# EAGLE board HACKberry_SizeM_Left (EAGLE 8.3.2)
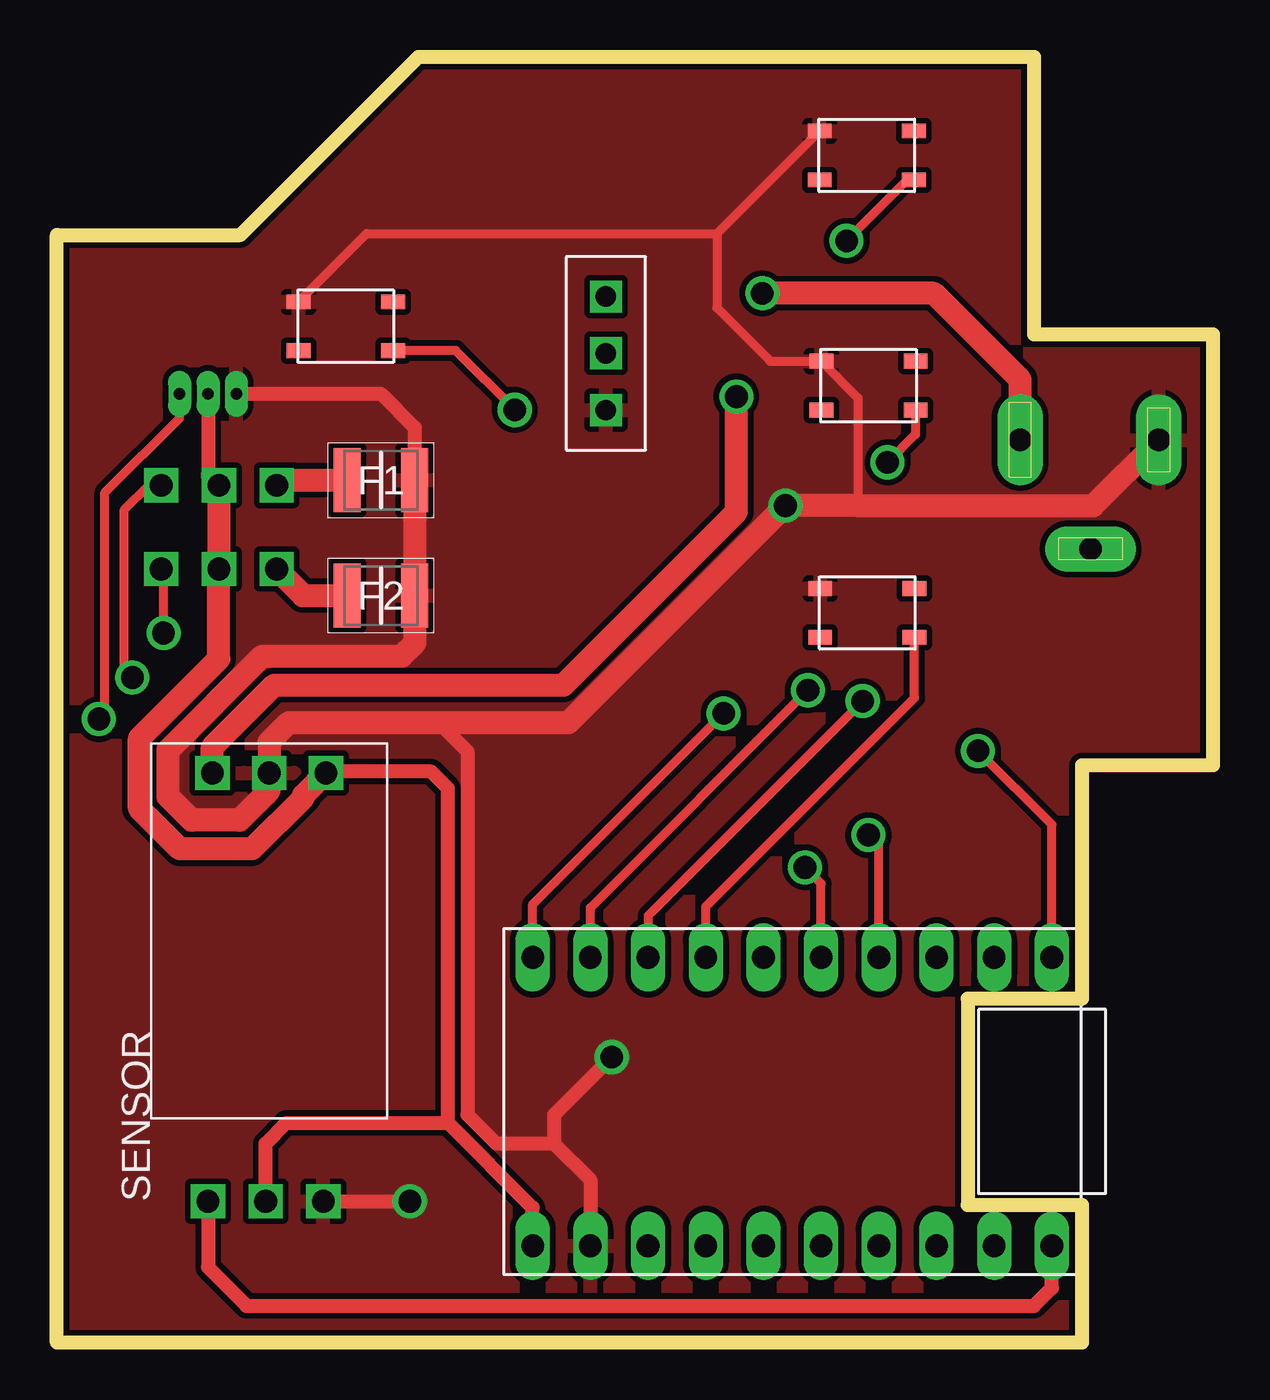
[diagram p0: board, top side]
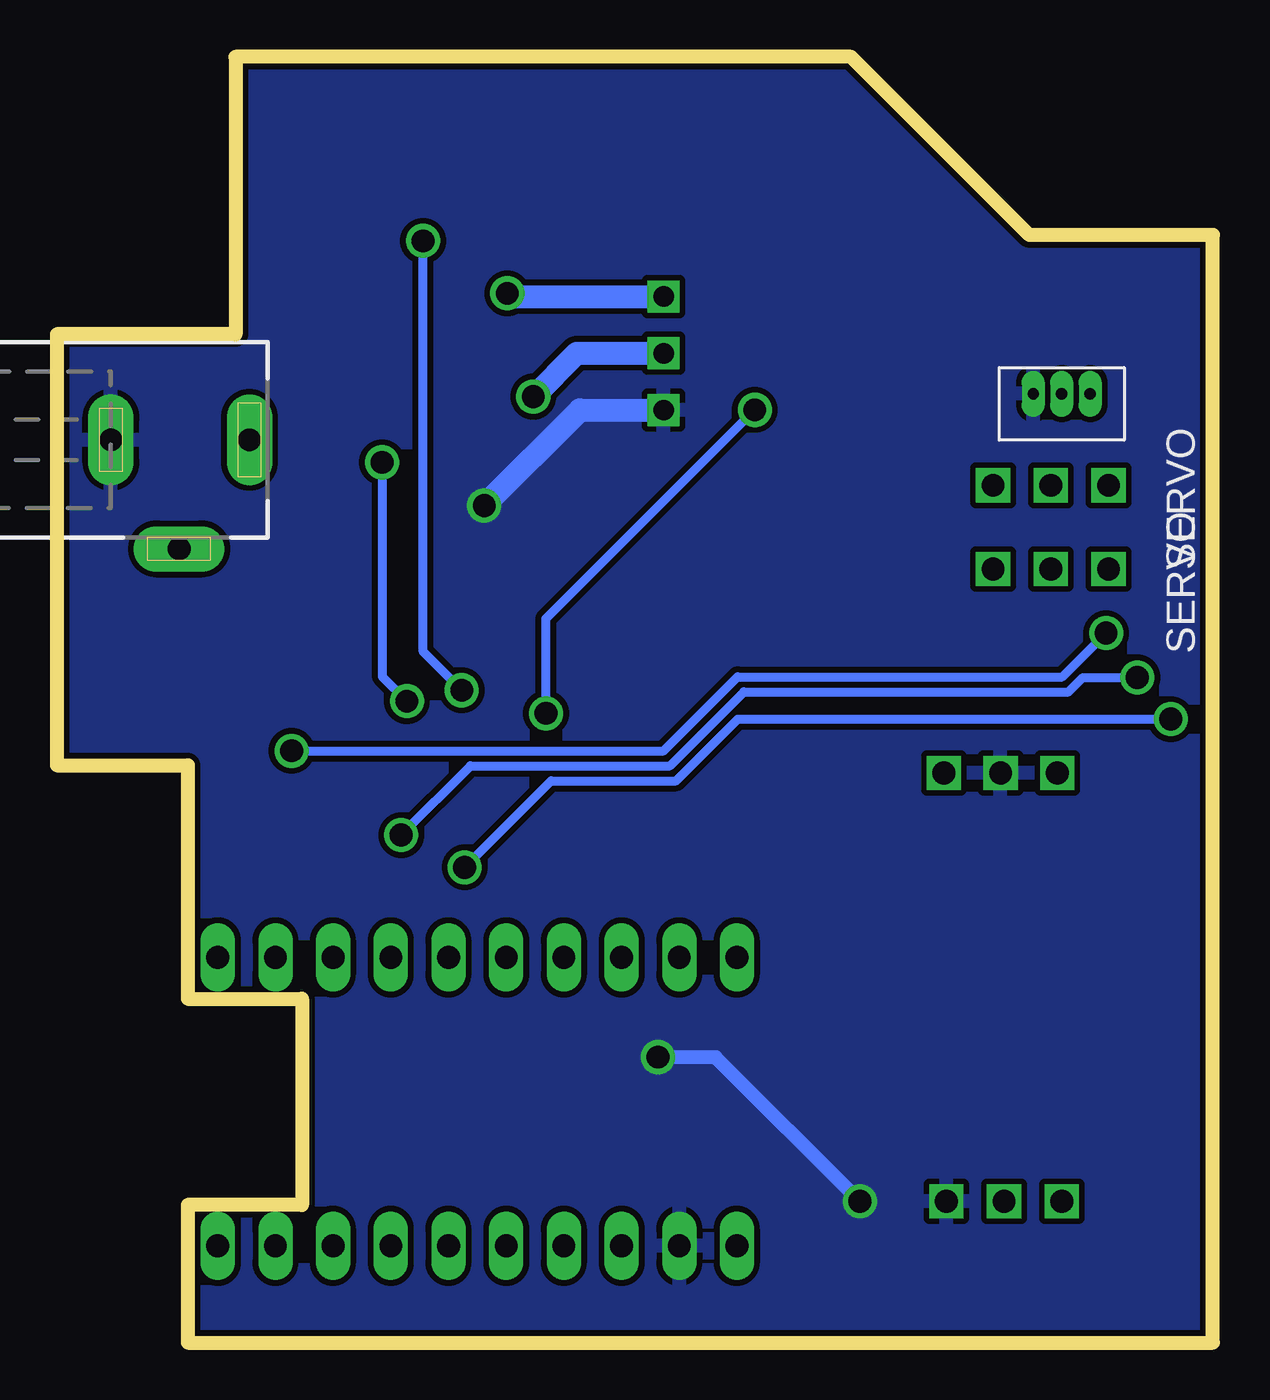
[diagram p1: board, bottom side, seen from below]

Size 50.9 x 56.62 mm. Coordinates in mm from the lower left corner, seen from the top.
Outline: 50.9,44.4 50.9,25.42 45.14,25.42 45.14,15.14 40.11,15.14 40.11,6.07 45.14,6.07 45.14,0 0,0 0,48.77 8.08,48.77 15.93,56.62 43.03,56.62 43.03,44.4 50.9,44.4
Copper layers (1*16): Top 0.035mm / dielectric 1.5mm / Bottom 0.035mm
Design rules "default *": minimum track width 6mil, minimum drill 0.35mm, track to track 10mil, track to pad 10mil, pad to pad 10mil, via to via 10mil, smd to smd 10mil, copper to edge 10mil, drill to drill 6mil, minimum pad ring 10mil, minimum via ring 8mil, stop-mask expansion 4mil, vias tented up to drill 0mil, thermal gap 10mil

## Footprints (pad centres in the part's own frame; a part is rotated, then mirrored left to right if it is on the bottom)
FUSC3226X85N = smd 1.18 x 2.81: 1 -1.485,0; 2 1.485,0
OKI-78SR-HORIZONTAL = drill 1 square: 1 2.5,-6.95; 2 0,-6.95; 3 -2.5,-6.95
NN_SERVO = drill 1 square: SERVO_5V 0,0; SERVO_GND 0,-2.54; SERVO_SIGNAL 0,2.54
DCJ0303 = drill 1 pad 2 long: 1 0,3.1; 2 4.8,0; 3 0,-3
53047-0310_SERVO = drill 0.5 long: 5V 0,0; GND 0,-1.25; SIG 0,1.25
SKRPACE010 = smd 1.05 x 0.65: PINA_LEFT -2.075,1.075; PINA_RIGHT 2.075,1.075; PINB_LEFT -2.075,-1.075; PINB_RIGHT 2.075,-1.075
SS-12D00 = drill 0.9 square: P$1 0,2.5; P$2 0,0; P$3 0,-2.5
POLOLU_A_STAR_32U4_MICRO = drill 1 long: 3V3 6.35,-3.81; 5V 6.35,-6.35; A0 6.35,11.43; A1 6.35,8.89; GND 6.35,-8.89; GPIO_0 -6.35,-11.43; GPIO_1 -6.35,-8.89; GPIO_2 -6.35,-6.35; GPIO_3 -6.35,-3.81; GPIO_4 -6.35,-1.27; GPIO_5 -6.35,1.27; GPIO_6 -6.35,3.81; GPIO_7 -6.35,6.35; GPIO_8 -6.35,8.89; GPIO_9 -6.35,11.43; GPIO_10 6.35,6.35; GPIO_11 6.35,3.81; GPIO_12 6.35,1.27; RST 6.35,-1.27; VIN 6.35,-11.43
NN_SENSOR = drill 1 square: 5V 0,0; GND 0,-2.54; SIGNAL 0,2.54

## Placement (x,y rotation side)
F1  MICROSMD010F-2  [FUSC3226X85N]  14.27,37.97 180 top
F2  MICROSMD010F-2  [FUSC3226X85N]  14.27,32.89 180 top
IC1  OKI-78SR-5_1.5-W36H-C  [OKI-78SR-HORIZONTAL]  9.35,18.14 180 top
INDEXPIN  NN_SERVO  [NN_SERVO]  7.14,34.06 270 bottom
J1  [DCJ0303]  45.52,39.75 270 bottom
MIDDLEPIN  NN_SERVO  [NN_SERVO]  7.14,37.74 270 bottom
THUMBPIN  53047-0310_SERVO  [53047-0310_SERVO]  6.65,41.78 270 bottom
U$1  SKRPACE010  [SKRPACE010]  35.66,52.27 0 top
U$2  SS-12D00  [SS-12D00]  24.18,43.56 0 top
U$3  SKRPACE010  [SKRPACE010]  35.74,42.14 0 top
U$4  SKRPACE010  [SKRPACE010]  35.69,32.13 0 top
U$5  SKRPACE010  [SKRPACE010]  12.73,44.75 0 top
U$6  POLOLU_A_STAR_32U4_MICRO  [POLOLU_A_STAR_32U4_MICRO]  32.38,10.62 270 top
U$7  NN_SENSOR  [NN_SENSOR]  9.19,6.22 90 top

## Library data of the parts
F1 F2 = HbHandBoard_SizeM; DESCRIPTION: Micro SMD polyswitch fuse,100mA TE Connectivity 0.1A Surface Mount Resettable Fuse, 30 V dc; HEIGHT: 0.85mm; MANUFACTURER_NAME: LITTELFUSE WICKMANN; MANUFACTURER_PART_NUMBER: MICROSMD010F-2; RS_PART_NUMBER: 5463030; SUPPLIER_NAME: RS
IC1 = HbHandBoard_SizeM; DESCRIPTION: Switching Regulator 7-36Vin 5Vo 1.5A Non-Isolated DC-DC Converter, 5V dc Output, 1.5A; HEIGHT: mm; MANUFACTURER_NAME: Murata Electronics; MANUFACTURER_PART_NUMBER: OKI-78SR-5/1.5-W36H-C; RS_PART_NUMBER: 7962138P; SUPPLIER_NAME: RS
INDEXPIN J1 MIDDLEPIN THUMBPIN U$1-U$7 = HbHandBoard_SizeM

## Nets
+5V: IC1.3 INDEXPIN.SERVO_5V MIDDLEPIN.SERVO_5V THUMBPIN.5V U$6.VIN U$7.5V
GND: F1.1 F2.1 IC1.2 J1.3 THUMBPIN.GND U$1.PINA_LEFT U$2.P$3 U$3.PINA_LEFT U$4.PINA_LEFT U$5.PINA_LEFT U$6.GND U$7.GND
N$1: J1.1 U$2.P$1
N$2: F1.2 MIDDLEPIN.SERVO_GND
N$3: F2.2 INDEXPIN.SERVO_GND
N$11: U$6.A0 U$7.SIGNAL
PIN_INDEXSERVO: INDEXPIN.SERVO_SIGNAL U$6.GPIO_9
PIN_MIDDLESERVO: MIDDLEPIN.SERVO_SIGNAL U$6.GPIO_6
PIN_THUMBSERVO: THUMBPIN.SIG U$6.GPIO_5
SWITCH_HOLD: U$5.PINB_RIGHT U$6.GPIO_0
SWITCH_INIT: U$1.PINB_RIGHT U$6.GPIO_1
SWITCH_MODE: U$3.PINB_RIGHT U$6.GPIO_2
SWITCH_THUMB: U$4.PINB_RIGHT U$6.GPIO_3
V+: IC1.1 U$2.P$2

## Tracks (layer width: path | path; a pad name or v marks a point on that pad's centre or on a via)
+5V
  Top 0.61: THUMBPIN.5V 6.65,38.23 arc90 MIDDLEPIN.SERVO_5V | U$6.VIN 20.95,5.94 17.22,9.68 | 17.22,9.68 17.22,24.41 16.48,25.15 11.91,25.15 IC1.3 | U$7.5V 9.19,8.76 10.11,9.68 17.22,9.68
  Top 1.016: IC1.3 10.86,24.1 10.86,24.02 8.59,21.74 5.42,21.74 3.63,23.53 3.63,26.61 7.14,30.11 INDEXPIN.SERVO_5V MIDDLEPIN.SERVO_5V
GND  (via drill 1 pad 1.3)
  Top 0.406: 35.28,36.86 35.28,41.6 U$3.PINA_LEFT 31.41,43.21 29.06,45.57 29.06,48.82 29.07,48.83 | 29.07,48.83 U$1.PINA_LEFT | U$5.PINA_LEFT 13.65,48.83 29.07,48.83
  Top 0.61: THUMBPIN.GND 14.27,41.78 15.76,40.3 F1.1 | 16.81,27.3 18.08,26.04 18.08,10.03 19.35,8.76 21.89,8.76 | 21.89,8.76 23.49,7.16 U$6.GND | U$7.GND v15.54,6.22 | v24.43,12.57 21.89,10.03 21.89,8.76
  Top 1.016: J1.3 45.62,36.86 35.28,36.86 v32.08,36.86 22.53,27.3 16.81,27.3 10.21,27.3 9.35,26.44 IC1.2 9.35,24.31 8.05,23.01 5.94,23.01 4.9,24.05 4.9,26.08 9.05,30.23 15.19,30.23 15.77,30.81 15.77,32.88 F2.1 F1.1
  Bottom 0.61: v15.54,6.22 21.89,12.57 v24.43,12.57
  Bottom 1.016: v32.08,36.86 27.87,41.06 U$2.P$3
  pour Top: 0.03,48.77 0.03,0 45.14,0 45.14,6.07 40.11,6.07 40.11,15.14 45.14,15.14 45.14,25.43 50.93,25.43 50.93,44.4 43.03,44.4 43.03,56.62 15.93,56.62 8.08,48.77
  pour Bottom: 0,48.74 0,0 45.14,0 45.14,6.07 40.11,6.07 40.11,15.14 45.14,15.14 45.14,25.43 50.93,25.43 50.93,44.4 43.03,44.4 43.03,56.62 15.9,56.62 8.03,48.74
N$1  (via drill 1 pad 1.3)
  Top 1.016: J1.1 42.42,42.39 38.61,46.2 v31.06,46.2
  Bottom 1.016: v31.06,46.2 30.92,46.06 U$2.P$1
N$2
  Top 1.016: MIDDLEPIN.SERVO_GND 9.91,37.97 F1.2
N$3
  Top 1.016: INDEXPIN.SERVO_GND 10.85,32.89 F2.2
N$11
  Top 0.61: U$7.SIGNAL 6.65,3.33 8.36,1.63 43.03,1.63 43.81,2.41 U$6.A0
PIN_INDEXSERVO  (via drill 1 pad 1.3)
  Top 0.406: U$6.GPIO_9 43.81,22.81 v40.56,26.06 | v4.7,31.24 4.7,33.96 INDEXPIN.SERVO_SIGNAL
  Bottom 0.406: v40.56,26.06 24.18,26.06 20.93,29.31 6.63,29.31 v4.7,31.24
PIN_MIDDLESERVO  (via drill 1 pad 1.3)
  Top 0.406: U$6.GPIO_6 36.19,21.89 v35.74,22.35 | v3.33,29.29 2.97,29.64 2.97,36.68 4.04,37.74 MIDDLEPIN.SERVO_SIGNAL
  Bottom 0.406: v35.74,22.35 32.69,25.4 23.91,25.4 20.66,28.65 6.36,28.65 5.72,29.29 v3.33,29.29
PIN_THUMBSERVO  (via drill 1 pad 1.3)
  Top 0.406: U$6.GPIO_5 33.65,20.22 v32.94,20.93 | v1.85,27.46 2.12,27.72 2.12,37.42 5.4,40.71 THUMBPIN.SIG
  Bottom 0.406: v32.94,20.93 29.13,24.74 23.63,24.74 20.92,27.46 v1.85,27.46
SWITCH_HOLD  (via drill 1 pad 1.3)
  Top 0.406: U$6.GPIO_0 20.95,19.3 v29.36,27.71 | v20.17,41.07 17.56,43.68 U$5.PINB_RIGHT
  Bottom 0.406: v29.36,27.71 29.36,31.88 v20.17,41.07
SWITCH_INIT  (via drill 1 pad 1.3)
  Top 0.406: U$6.GPIO_1 23.49,19.15 v33.07,28.73 | v34.77,48.51 37.46,51.2 U$1.PINB_RIGHT
  Bottom 0.406: v33.07,28.73 34.77,30.43 v34.77,48.51
SWITCH_MODE  (via drill 1 pad 1.3)
  Top 0.406: U$3.PINB_RIGHT 37.81,40 v36.58,38.76 | v35.48,28.25 26.03,18.8 U$6.GPIO_2
  Bottom 0.406: v36.58,38.76 36.58,29.34 v35.48,28.25
SWITCH_THUMB
  Top 0.406: U$6.GPIO_3 28.57,19.2 37.76,28.39 U$4.PINB_RIGHT
V+  (via drill 1 pad 1.3)
  Top 1.016: IC1.1 6.85,26.23 9.58,28.96 22.3,28.96 29.92,36.58 v29.92,41.66
  Bottom 1.016: v29.92,41.66 28.02,43.56 U$2.P$2